# EAGLE board CC2530_PCB_Updated_Antenna+Stim+EMG (EAGLE 7.1.0)
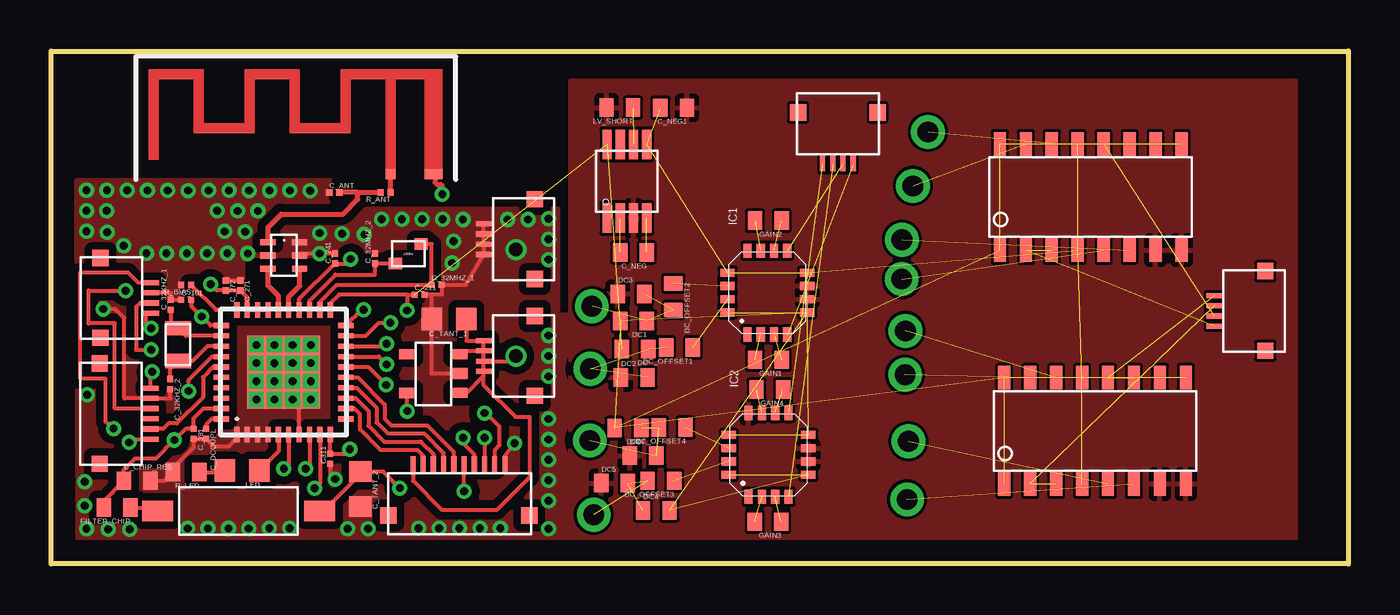
[diagram p0: board, top side]
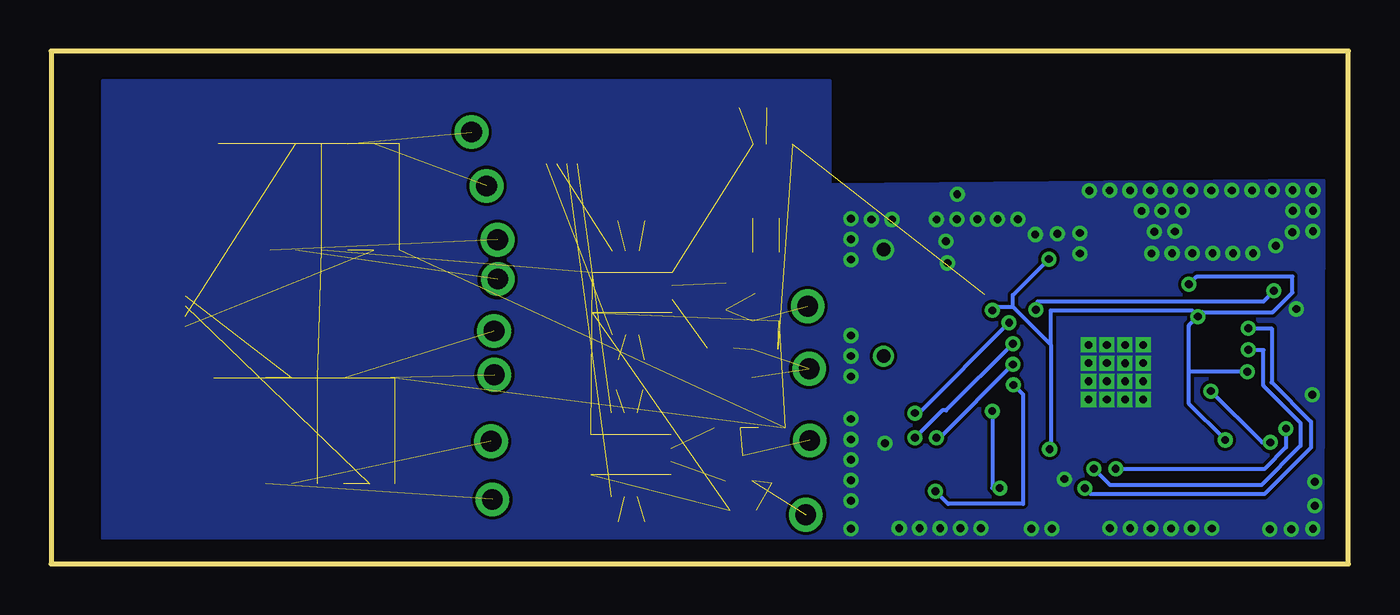
[diagram p1: board, bottom side, seen from below]

Size 63.5 x 25.08 mm. Coordinates in mm from the lower left corner, seen from the top.
Outline: 0,0 0,25.08 63.5,25.08 63.5,0 0,0
Copper layers (1*16): Top 0.0356mm / dielectric 1.5011mm / Bottom 0.0356mm
Design rules "Eagle_DRC_OSHPark": minimum track width 6mil, minimum drill 13mil, track to track 6mil, track to pad 6mil, pad to pad 6mil, via to via 6mil, smd to smd 6mil, copper to edge 15mil, drill to drill 6mil, minimum pad ring 7mil, minimum via ring 7mil, stop-mask expansion 3mil, vias tented up to drill 0mil, thermal gap 10mil

## Footprints (pad centres in the part's own frame; a part is rotated, then mirrored left to right if it is on the bottom)
X32.768KHZ = smd 1.25 x 0.7: Q1 0.009,-0.811; Q2 0.009,0.789
0201_R/L/C = smd 0.3 x 0.3: 1 -0.245,-0.001; 2 0.245,-0.001
0402_R/L/C = smd 0.7 x 0.9: 1 -0.65,0.001; 2 0.65,0.001
0603_R/L/C = smd 1 x 1.1: 1 -0.85,0; 2 0.85,0
DBG_ELECTRODE = drill 1.016 pad 1.651: P$1 0,0
FFC4POS = smd 0.762 x 0.254: 1 0.04,0.742; 2 0.04,0.242; 3 0.04,-0.258; 4 0.04,-0.758 | smd 0.8 x 0.8: P$5 -2.46,1.94; P$6 -2.46,-1.96
QFN-16 = smd 0.7 x 0.4: -IN1 -2.05,0.975; -IN2 2.05,0.975; IN1 -2.05,-0.975; IN2 2.05,-0.975; RG1 -2.05,0.325; RG1_1 -2.05,-0.325; RG2 2.05,0.325; RG2_1 2.05,-0.325 | smd 0.4 x 0.7: -VS 0.975,1.95; -VS_B 0.975,-1.95; OUT1 -0.325,1.95; OUT2 0.325,1.95; REF1 -0.325,-1.95; REF2 0.325,-1.95; VS -0.975,1.95; VS_B -0.975,-1.95
ANTENNA = smd 0.5 x 0.5: A 0,0 | smd 0.5 x 0.9: GND 0,-2.1
CC2530 = smd 0.762 x 0.254: AVDD1 3.048,1.27; AVDD2 3.048,0.762; AVDD3 3.048,-0.762; AVDD4 3.048,1.778; AVDD5 3.048,-2.286; DVDD2 -3.048,-2.286; GND1 -3.048,2.286; GND2 -3.048,1.778; GND3 -3.048,1.27; GND4 -3.048,0.762; P1_1 -3.048,-1.778; P1_2 -3.048,-1.27; P1_3 -3.048,-0.762; P1_4 -3.048,-0.254; P1_5 -3.048,0.254; RBIAS 3.048,2.286; RF_N 3.048,0.254; RF_P 3.048,-0.254; XOSC_Q1 3.048,-1.778; XOSC_Q2 3.048,-1.27 | smd 0.254 x 0.762: AVDD6 2.286,3.048; DCOUPL -2.286,3.048; DVDD1 -1.778,3.048; P0_0 1.778,-3.048; P0_1 1.27,-3.048; P0_2 0.762,-3.048; P0_3 0.254,-3.048; P0_4 -0.254,-3.048; P0_5 -0.762,-3.048; P0_6 -1.27,-3.048; P0_7 -1.778,-3.048; P1_0 -2.286,-3.048; P1_6 -1.27,3.048; P1_7 -0.762,3.048; P2_0 -0.254,3.048; P2_1 0.254,3.048; P2_2 0.762,3.048; P2_3/XOSC32K_Q2 1.27,3.048; P2_4/XOSC32K_Q1 1.778,3.048; RESET_N 2.286,-3.048 | smd 3.56 x 3.56: GND0 0,0 | drill 0.381 square: GND001 -1.335,1.335; GND002 -0.445,1.335; GND003 0.445,1.335; GND004 1.335,1.335; GND005 -1.335,0.445; GND006 -0.445,0.445; GND007 0.44,0.445; GND008 1.335,0.445; GND009 -1.335,-0.445; GND010 -0.445,-0.445; GND011 0.445,-0.445; GND012 1.335,-0.445; GND013 -1.335,-1.335; GND014 -0.445,-1.335; GND015 0.445,-1.335; GND016 1.335,-1.335
BALUN = smd 0.75 x 0.3: BALANCED3 -0.782,-0.655; BALANCED4 0.768,-0.655; GND2 -0.782,-0.005; GND5 0.768,-0.005; GND6 0.768,0.645; UNBALANCED -0.782,0.645
X32MHZ = smd 0.55 x 0.65: Q1 0.496,-0.576; Q2 -0.454,0.674
S-PDSO-G8 = smd 0.45 x 1.45: 1 -0.975,-1.8; 2 -0.325,-1.8; 3 0.325,-1.8; 4 0.975,-1.8; 5 0.975,1.8; 6 0.325,1.8; 7 -0.325,1.8; 8 -0.975,1.8
SOIC-16-ON-SEMI = smd 0.6 x 1.15: 1 -4.445,-2.6; 2 -3.175,-2.6; 3 -1.905,-2.6; 4 -0.635,-2.6; 5 0.635,-2.6; 6 1.905,-2.6; 7 3.175,-2.6; 8 4.445,-2.6; 9 4.445,2.6; 10 3.175,2.6; 11 1.905,2.6; 12 0.635,2.6; 13 -0.635,2.6; 14 -1.905,2.6; 15 -3.175,2.6; 16 -4.445,2.6
REGULATOR = smd 0.5 x 0.8: 1 0.94,1.275; 2 0,1.275; 3 -0.95,1.275; 4 -0.95,-1.275; 5 0.95,-1.275
FFC10POS = smd 0.762 x 0.254: 1 -0.015,2.271; 2 -0.015,1.771; 3 -0.015,1.271; 4 -0.015,0.771; 5 -0.015,0.271; 6 -0.015,-0.229; 7 -0.015,-0.729; 8 -0.015,-1.229; 9 -0.015,-1.729; 10 -0.015,-2.229 | smd 0.8 x 0.8: P$11 -2.52,3.47; P$12 -2.52,-3.43
FFC6POS = smd 0.762 x 0.254: 1 0.008,1.269; 2 0.008,0.769; 3 0.008,0.269; 4 0.008,-0.231; 5 0.008,-0.731; 6 0.008,-1.231 | smd 0.8 x 0.8: P$7 -2.49,2.47; P$8 -2.49,-2.43
SWITCH_MANUAL = smd 1.524 x 1.016: 1 -4.13,0; 2 3.81,0
DRILL_CONNECT = drill 0.66 pad 1.016: 1 0,0

## Placement (x,y rotation side)
32KHZ  X32.768KHZ  [X32.768KHZ]  6.23,10.71 180 top
C311  100nF  [0201_R/L/C]  13.67,5.14 90 top
C_32KHZ_1  15pF  [0201_R/L/C]  5.86,12.67 90 top
C_32KHZ_2  15pF  [0201_R/L/C]  5.84,8.79 270 top
C_32MHZ_1  20pF  [0201_R/L/C]  18.87,13.65 0 top
C_32MHZ_2  20pF  [0201_R/L/C]  15.85,14.94 90 top
C_101  100nF  [0201_R/L/C]  6.62,12.91 0 top
C_211  100nF  [0201_R/L/C]  18.04,13.17 0 top
C_241  100nF  [0201_R/L/C]  13.9,14.93 90 top
C_271  100nF  [0201_R/L/C]  9.27,13.62 270 top
C_272  220pF  [0201_R/L/C]  8.56,13.62 270 top
C_391  1uF  [0201_R/L/C]  6.98,6.35 270 top
C_ANT  0.5pF  [0201_R/L/C]  13.86,18.16 0 top
C_CHIP_RES  2.2uF  [0402_R/L/C]  4.21,4.06 0 top
C_DCOUPL  0.47uF  [0201_R/L/C]  7.6,6.35 270 top
C_NEG  10uF  [0402_R/L/C]  28.5,15.23 180 top
C_NEG1  10uF  [0402_R/L/C]  30.47,22.31 180 top
C_TANT_1  1uF  [0603_R/L/C]  19.49,11.98 180 top
C_TANT_2  2.2uF  [0603_R/L/C]  15.14,3.66 270 top
DC  0  [0402_R/L/C]  28.58,10.5 180 top
DC1  0  [0402_R/L/C]  28.51,11.88 180 top
DC2  0  [0402_R/L/C]  28.54,9.12 0 top
DC3  0  [0402_R/L/C]  28.38,13.21 0 top
DC4  0  [0402_R/L/C]  29.62,2.61 0 top
DC5  0  [0402_R/L/C]  27.57,3.94 0 top
DC6  0  [0402_R/L/C]  28.23,6.64 180 top
DC7  0  [0402_R/L/C]  28.98,5.29 0 top
DC_OFFSET1  10uF  [0402_R/L/C]  30.75,10.57 180 top
DC_OFFSET2  10uF  [0402_R/L/C]  30.46,13.07 270 top
DC_OFFSET3  10uF  [0402_R/L/C]  29.84,4.06 180 top
DC_OFFSET4  10uF  [0402_R/L/C]  30.4,6.67 180 top
EMG1  DBG_ELECTRODE  [DBG_ELECTRODE]  26.4,9.55 0 top
FILTER_CHIP  L_1k  [0402_R/L/C]  3.24,2.75 180 top
GAIN1  0  [0402_R/L/C]  35.11,9.98 180 top
GAIN2  0  [0402_R/L/C]  35.11,16.79 180 top
GAIN3  0  [0402_R/L/C]  35.09,2.06 180 top
GAIN4  0  [0402_R/L/C]  35.18,8.52 180 top
GND_IN  FFC4POS  [FFC4POS]  21.22,15.87 180 top
IC1  AD8222_NEW  [QFN-16]  35.06,13.27 90 top
IC2  AD8222_NEW  [QFN-16]  35.12,5.33 90 top
INVERTED_F-ANTENNA  ANTENNA  [ANTENNA]  16.62,19.05 90 top
LED  [0603_R/L/C]  9.35,4.57 180 top
LV_SHORT  0  [0402_R/L/C]  27.84,22.32 180 top
R_ANT  0.0  [0201_R/L/C]  16.38,18.16 180 top
R_BIAS  56k  [0201_R/L/C]  6.62,13.64 180 top
R_LED  1k  [0402_R/L/C]  6.61,4.49 180 top
U$1  [CC2530]  11.38,9.37 90 top
U$2  BALUN  [BALUN]  11.4,15.09 0 top
U$3  X32MHZ  [X32MHZ]  17.53,15.15 90 top
U$4  TL7660  [S-PDSO-G8]  28.18,18.71 0 top
U$5  MC74HC4316A  [SOIC-16-ON-SEMI]  50.88,17.95 0 top
U$6  MC74HC4316A  [SOIC-16-ON-SEMI]  51.09,6.5 0 top
U$9  DBG_ELECTRODE  [DBG_ELECTRODE]  42.92,21.13 0 top
U$10  REGULATOR  [REGULATOR]  18.71,9.31 270 top
U$11  DBG_ELECTRODE  [DBG_ELECTRODE]  42.19,18.49 0 top
U$12  DBG_ELECTRODE  [DBG_ELECTRODE]  41.64,15.86 0 top
U$13  FFC4POS  [FFC4POS]  4.87,13.01 0 top
U$14  DBG_ELECTRODE  [DBG_ELECTRODE]  41.64,13.93 0 top
U$15  FFC10POS  [FFC10POS]  19.98,4.89 90 top
U$16  DBG_ELECTRODE  [DBG_ELECTRODE]  41.9,3.15 0 top
U$17  FFC6POS  [FFC6POS]  4.87,7.33 0 top
U$18  SWITCH_MANUAL  [SWITCH_MANUAL]  9.02,2.59 180 top
U$19  DBG_ELECTRODE  [DBG_ELECTRODE]  41.96,5.99 0 top
U$22  DBG_ELECTRODE  [DBG_ELECTRODE]  41.81,11.39 0 top
U$23  DBG_ELECTRODE  [DBG_ELECTRODE]  41.8,9.25 0 top
U$24  FFC4POS  [FFC4POS]  38.52,19.62 270 top
U$25  DBG_ELECTRODE  [DBG_ELECTRODE]  26.47,12.6 0 top
U$26  DBG_ELECTRODE  [DBG_ELECTRODE]  26.56,2.4 0 top
U$27  DBG_ELECTRODE  [DBG_ELECTRODE]  26.37,6.04 0 top
U$28  FFC4POS  [FFC4POS]  56.97,12.36 180 top
V+_IN  FFC4POS  [FFC4POS]  21.22,10.16 180 top
WIRE+  DRILL_CONNECT  [DRILL_CONNECT]  22.75,10.16 90 top
WIRE-  DRILL_CONNECT  [DRILL_CONNECT]  22.75,15.36 90 top

## Library data of the parts
32KHZ C311 C_32KHZ_1 C_32KHZ_2 C_32MHZ_1 C_32MHZ_2 C_101 C_211 C_241 C_271 C_272 C_391 C_ANT C_CHIP_RES C_DCOUPL C_NEG C_NEG1 C_TANT_1 C_TANT_2 DC DC1-DC7 DC_OFFSET1-DC_OFFSET4 FILTER_CHIP GAIN1-GAIN4 GND_IN INVERTED_F-ANTENNA LED LV_SHORT R_ANT R_BIAS R_LED U$1 U$2 U$10 U$13 U$15 U$17 U$18 U$24 U$28 V+_IN WIRE+ WIRE- = CC2530_PCB_TL
EMG1 IC1 IC2 U$4-U$6 U$9 U$11 U$12 U$14 U$16 U$19 U$22 U$23 U$25-U$27 = moth
U$3 = CC2530_PCB_TL; X: 32MHz

## Nets
DCOUPL1: C_DCOUPL.1 U$1.DCOUPL
EMG1: DC2.2 DC.1 DC_OFFSET1.2 EMG1.P$1
EMG2: DC1.1 DC3.2 DC_OFFSET2.2 U$25.P$1
EMG3: DC4.1 DC5.2 DC_OFFSET3.2 U$26.P$1
EMG4: DC6.1 DC7.2 DC_OFFSET4.2 U$27.P$1
GND: C311.1 C_32KHZ_1.2 C_32KHZ_2.2 C_32MHZ_1.2 C_32MHZ_2.2 C_101.1 C_211.2 C_241.2 C_271.1 C_272.1 C_391.2 C_ANT.1 C_CHIP_RES.2 C_DCOUPL.2 C_NEG1.1 C_TANT_1.2 C_TANT_2.2 DC2.1 DC3.1 DC5.1 DC7.1 GND_IN.1 GND_IN.2 GND_IN.3 GND_IN.4 IC1.REF1 IC1.REF2 IC2.-IN2 IC2.REF1 IC2.REF2 INVERTED_F-ANTENNA.GND LV_SHORT.2 R_BIAS.2 R_LED.2 U$1.GND0 U$1.GND001 U$1.GND1 U$1.GND2 U$1.GND002 U$1.GND003 U$1.GND3 U$1.GND4 U$1.GND004 U$1.GND005 U$1.GND006 U$1.GND007 U$1.GND008 U$1.GND009 U$1.GND010 U$1.GND011 U$1.GND012 U$1.GND013 U$1.GND014 U$1.GND015 U$1.GND016 U$1.P1_3 U$2.GND2 U$2.GND5 U$2.GND6 U$4.3 U$5.7 U$5.8 U$6.7 U$6.8 U$10.2 U$13.2 U$15.10 U$17.2 WIRE-.1
LED/P1_5: LED.1 U$1.P1_5
LT/P1_4: U$1.P1_4 U$13.1
N$1: C_ANT.2 R_ANT.2 U$2.UNBALANCED
N$2: INVERTED_F-ANTENNA.A R_ANT.1
N$3: C_NEG.2 U$4.2
N$4: C_NEG.1 U$4.4
N$5: LV_SHORT.1 U$4.6
N$6: GAIN1.2 IC1.RG1
N$7: GAIN1.1 IC1.RG1_1
N$8: GAIN2.2 IC1.RG2
N$9: GAIN2.1 IC1.RG2_1
N$10: GAIN3.2 IC2.RG1
N$11: GAIN3.1 IC2.RG1_1
N$12: GAIN4.2 IC2.RG2
N$13: GAIN4.1 IC2.RG2_1
N$14: DC_OFFSET1.1 IC1.OUT1
N$15: DC_OFFSET2.1 IC1.OUT2
N$16: DC_OFFSET4.1 IC2.OUT2
N$17: DC_OFFSET3.1 IC2.OUT1
N$18: IC2.IN2 U$24.4
N$19: IC2.IN1 U$24.3
N$20: IC1.IN2 U$24.2
N$21: C_TANT_2.1 U$10.5 U$18.1
N$22: IC1.IN1 U$24.1
N$34: LED.2 R_LED.1
NC: U$4.1
NEG_STIM1: U$5.5 U$14.P$1
NEG_STIM2: U$5.14 U$9.P$1
NEG_STIM3: U$6.5 U$19.P$1
NEG_STIM4: U$6.14 U$22.P$1
OSC: U$4.7
P0_0: U$1.P0_0 U$15.9
P0_1: U$1.P0_1 U$15.8
P0_2: U$1.P0_2 U$15.7
P0_3: U$1.P0_3 U$15.6
P0_4: U$1.P0_4 U$15.5
P0_5: U$1.P0_5 U$15.4
P0_6: U$1.P0_6 U$15.3
P0_7: U$1.P0_7 U$15.2
P2_1: U$1.P2_1 U$17.5
P2_2: U$1.P2_2 U$17.6
P2_3/X32K_Q2: 32KHZ.Q2 C_32KHZ_2.1 U$1.P2_3/XOSC32K_Q2
P2_4/X32K_Q1: 32KHZ.Q1 C_32KHZ_1.1 U$1.P2_4/XOSC32K_Q1
POS_STIM1: U$5.15 U$11.P$1
POS_STIM2: U$5.6 U$12.P$1
POS_STIM3: U$6.15 U$23.P$1
POS_STIM4: U$6.6 U$16.P$1
RBIAS: R_BIAS.1 U$1.RBIAS
RESET: U$1.RESET_N U$17.3
RF_N: U$1.RF_N U$2.BALANCED3
RF_P: U$1.RF_P U$2.BALANCED4
RT/P1_2: U$1.P1_2 U$13.3
STIM1: U$5.2 U$5.3 U$28.1
STIM2: U$5.11 U$5.12 U$28.2
STIM3: U$6.2 U$6.3 U$28.3
STIM4: U$6.11 U$6.12 U$28.4
SWITCH_OUT: FILTER_CHIP.1 U$18.2
UP/P1_1: U$1.P1_1 U$13.4
V+: C_TANT_1.1 U$10.1 U$10.3 U$15.1 V+_IN.1 V+_IN.2 V+_IN.3 V+_IN.4 WIRE+.1
VDD: C311.2 C_101.2 C_211.1 C_241.1 C_271.2 C_272.2 C_391.1 C_CHIP_RES.1 DC1.2 DC4.2 DC6.2 DC.2 FILTER_CHIP.2 IC1.VS IC1.VS_B IC2.VS IC2.VS_B U$1.AVDD1 U$1.AVDD2 U$1.AVDD3 U$1.AVDD4 U$1.AVDD5 U$1.AVDD6 U$1.DVDD1 U$1.DVDD2 U$4.8 U$5.1 U$5.10 U$5.16 U$6.1 U$6.10 U$6.16 U$17.1
VEE: C_NEG1.2 IC1.-VS IC1.-VS_B IC2.-VS IC2.-VS_B U$4.5 U$5.4 U$5.9 U$5.13 U$6.4 U$6.9 U$6.13
X32M_Q1: C_32MHZ_1.1 U$1.XOSC_Q1 U$3.Q1
X32M_Q2: C_32MHZ_2.1 U$1.XOSC_Q2 U$3.Q2

## Tracks (layer width: path | path; a pad name or v marks a point on that pad's centre or on a via)
DCOUPL1
  Top 0.203: U$1.DCOUPL 7.86,7.09 7.59,6.82 C_DCOUPL.1
EMG1  (3 unrouted)
EMG2  (3 unrouted)
EMG3  (3 unrouted)
EMG4  (3 unrouted)
GND  (via drill 0.38, 0.38 pad 0.64)
  Top 0.203: 18.79,19.05 INVERTED_F-ANTENNA.GND | U$1.GND4 U$1.GND3 U$1.GND2 U$1.GND1 9.1,6.14 8.71,5.75 7.95,5.75 C_DCOUPL.2 C_391.2 6.98,5.7 5.96,4.68 R_LED.2 5.54,4.06 C_CHIP_RES.2 | GND_IN.4 GND_IN.3 GND_IN.2 GND_IN.1 20.3,13.65 C_32MHZ_1.2 19.12,13.17 C_211.2 18.62,13.17 18.62,11.98 | U$10.2 18.62,9.31 18.62,11.98 | C_32KHZ_2.2 5.84,8.09 U$17.2 3.58,8.09 3.58,12.02 3.14,12.46 v2.54,12.46 | C_32KHZ_1.2 5.86,13.26 U$13.2 | C_32KHZ_1.2 | C_32KHZ_1.2 C_101.1 | C_272.1 C_271.1 | U$15.10 22.21,5.28 v22.69,5.9 | U$1.P1_3 12.14,8.04 U$1.GND009 U$1.GND005 U$1.GND001 U$1.GND002 U$1.GND006 U$1.GND010 U$1.GND011 U$1.GND007 U$1.GND003 U$1.GND004 U$1.GND008 U$1.GND012 U$1.GND016 U$1.GND015 U$1.GND014 U$1.GND013 | C_241.2 12.26,15.18 U$2.GND5 | C311.1 13.67,4.38 v13.9,4.14 | 18.62,11.98 C_TANT_1.2
  Top 0.254: 18.79,19.05 18.79,18.67 18.91,18.55 19.08,18.55 19.15,18.49 v19.15,18.08
  other vias: 1.73,18.27 1.73,17.27 1.73,16.27 5.71,18.27 2.73,18.27 3.72,18.27 4.72,18.27 6.71,18.26 10.69,18.26 7.71,18.27 8.71,18.27 9.7,18.26 11.69,18.27 12.68,18.26 10.12,17.26 2.73,17.27 8.14,17.27 9.13,17.26 24.34,1.71 24.35,5.08 24.35,6.08 24.34,3.08 24.34,4.08 6.68,1.73 21.99,1.74 20.99,1.74 17.99,1.74 19.98,1.73 18.99,1.73 11.68,1.73 10.68,1.73 7.68,1.73 9.68,1.72 8.68,1.72 13.15,15.18 13.15,16.18 18.16,16.85 16.18,16.85 17.17,16.85 19.16,16.85 20.16,16.85 14.24,16.14 15.33,16.11 7.64,15.19 5.65,15.19 6.64,15.19 8.63,15.19 9.63,15.18 9.5,16.24 8.49,16.26 4.67,15.19 3.56,15.56 2.75,16.22 19.7,15.79 19.62,14.71 24.35,7.08 15.52,1.71 14.51,1.71 24.35,9.17 24.35,10.17 24.35,11.17 24.35,14.88 24.35,15.88 24.35,16.89 23.35,16.85 22.34,16.85 1.73,1.71 2.79,1.69 3.84,1.69 1.64,2.84 1.64,4.02 1.77,8.28
  pour Top (isolate 0.381, no thermals): 13.67,17.37 13.67,18.77 1.23,18.77 1.27,1.27 25.4,1.27 25.4,12.19 9.42,12.32 9.42,15.04 11.92,15.06 13.64,15.06 13.64,12.42 24.85,12.42 24.85,17.37
  pour Bottom (no thermals): 1.23,18.77 1.27,1.27 25.4,1.27 25.4,18.54
  pour Bottom: 25.4,1.27 60.96,1.27 60.96,23.62 25.4,23.62
  pour Top: 60.96,1.27 60.96,23.62 25.4,23.62 25.4,1.27
LED/P1_5
  Top 0.203: U$1.P1_5 11.13,5.5 LED.1
LT/P1_4  (via drill 0.38 pad 0.64)
  Top 0.203: U$13.1 4.25,13.76 3.77,14.24 1.43,14.24 1.43,9.05 2.66,9.05 2.66,6.96 v3.06,6.61 | U$1.P1_4 11.63,4.89 v11.39,4.65
  Bottom 0.203: v11.39,4.65 4.11,4.65 3.06,5.7 v3.06,6.61
N$1
  Top 0.203: C_ANT.2
  Top 0.254: U$2.UNBALANCED 10.62,16.47 11.25,17.1 14.29,17.1 15.01,17.83 15.01,18.16 | 15.01,18.16 R_ANT.2 | 15.01,18.16 C_ANT.2
N$2
  Top 0.203: INVERTED_F-ANTENNA.A
  Top 0.254: R_ANT.1 INVERTED_F-ANTENNA.A
N$3  (1 unrouted)
N$4  (1 unrouted)
N$5  (1 unrouted)
N$6  (1 unrouted)
N$7  (1 unrouted)
N$8  (1 unrouted)
N$9  (1 unrouted)
N$10  (1 unrouted)
N$11  (1 unrouted)
N$12  (1 unrouted)
N$13  (1 unrouted)
N$14  (1 unrouted)
N$15  (1 unrouted)
N$16  (1 unrouted)
N$17  (1 unrouted)
N$18  (1 unrouted)
N$19  (1 unrouted)
N$20  (1 unrouted)
N$21  (via drill 0.38 pad 0.64)
  Top 0.203: v17.43,7.47 U$10.5 | U$18.1 13.35,2.58 15.14,4.37 C_TANT_2.1 16.26,4.51 v17.07,3.7
  Bottom 0.203: v17.43,7.47 17.43,3.7 v17.07,3.7
N$22  (1 unrouted)
N$34
  Top 0.203: 8.41,4.49 LED.2 8.51,4.49 R_LED.1
NEG_STIM1  (1 unrouted)
NEG_STIM2  (1 unrouted)
NEG_STIM3  (1 unrouted)
NEG_STIM4  (1 unrouted)
P0_0  (via drill 0.38 pad 0.64)
  Top 0.203: v21.21,7.37 21.29,7.37 21.94,6.72 21.94,5.79 21.71,5.57 U$15.9 | U$1.P0_0 15.38,11.15 16.02,11.79 v16.61,11.79
  Bottom 0.203: v16.61,11.79 21.02,7.37 v21.21,7.37
P0_1  (via drill 0.38 pad 0.64)
  Top 0.203: v21.21,6.17 U$15.8 | U$15.8 | U$1.P0_1 16.3,10.64 v16.43,10.77
  Bottom 0.203: v21.21,6.17 19.88,7.51 19.69,7.51 v16.43,10.77
P0_2  (via drill 0.38 pad 0.64)
  Top 0.203: v20.16,6.17 20.16,5.9 20.71,5.35 U$15.7 | U$1.P0_2 16.04,10.13 v16.42,9.75
  Bottom 0.203: v16.42,9.75 20,6.17 v20.16,6.17
P0_3  (via drill 0.38 pad 0.64)
  Top 0.203: v20.21,3.55 U$15.6 | U$1.P0_3 15.52,9.63 v16.4,8.75
  Bottom 0.203: v20.21,3.55 19.59,2.93 15.93,2.93 15.93,8.29 v16.4,8.75
P0_4
  Top 0.203: U$1.P0_4 15.01,9.12 16.34,7.79 16.34,7.08 16.64,6.78 18.41,6.78 19.71,5.48 U$15.5
P0_5
  Top 0.203: U$1.P0_5 14.96,8.61 15.93,7.64 15.93,6.92 16.47,6.38 18.25,6.38 19.21,5.41 U$15.4
P0_6
  Top 0.203: U$1.P0_6 14.9,8.1 15.53,7.47 15.53,6.75 16.31,5.97 18.09,5.97 18.71,5.35 U$15.3
P0_7
  Top 0.203: U$15.2 18.21,5.28 17.93,5.56 16.14,5.56 15.13,6.58 15.13,7.32 14.85,7.59 U$1.P0_7
P2_1
  Top 0.203: U$1.P2_1 7.93,9.63 7.44,9.13 7.44,8.16 6.15,6.87 5.76,6.87 5.49,6.59 U$17.5
P2_2  (via drill 0.38 pad 0.64)
  Top 0.203: v6.74,8.45 6.74,9.01 7.86,10.13 U$1.P2_2 | v3.82,5.94 3.98,6.09 U$17.6
  Bottom 0.203: v3.82,5.94 4.22,5.94 v6.74,8.45
P2_3/X32K_Q2
  Top 0.203: U$1.P2_3/XOSC32K_Q2 7.65,10.64 6.93,9.92 32KHZ.Q2 5.84,9.54 C_32KHZ_2.1
P2_4/X32K_Q1
  Top 0.203: U$1.P2_4/XOSC32K_Q1 6.59,11.15 32KHZ.Q1 5.86,11.52 C_32KHZ_1.1
POS_STIM1  (1 unrouted)
POS_STIM2  (1 unrouted)
POS_STIM3  (1 unrouted)
POS_STIM4  (1 unrouted)
RBIAS
  Top 0.203: U$1.RBIAS 8.08,12.42 R_BIAS.1
RESET  (via drill 0.38 pad 0.64)
  Top 0.203: U$1.RESET_N 15.19,12.42 v15.29,12.42 | U$17.3 3.12,7.59 3.12,11.76 1.84,11.76 1.84,13.36 v3.65,13.36
  Bottom 0.203: v15.29,12.42 15.29,12.74 15.2,12.83 4.18,12.83 3.65,13.35 v3.65,13.36
RF_N
  Top 0.203: U$2.BALANCED3
  Top 0.254: U$1.RF_N 11.13,13.09 10.62,13.6 U$2.BALANCED3
RF_P
  Top 0.203: U$2.BALANCED4
  Top 0.254: U$1.RF_P 11.63,13.06 12.17,13.59 U$2.BALANCED4
RT/P1_2  (via drill 0.38 pad 0.64)
  Top 0.203: U$1.P1_2 12.65,4.84 v12.46,4.65 | U$13.3 4.35,12.76 4.16,12.56 4.16,10.47 v4.9,10.47
  Bottom 0.203: v4.9,10.47 4.16,10.47 4.16,8.71 2.34,6.89 2.34,5.77 4.26,3.85 11.66,3.85 v12.46,4.65
STIM1  (2 unrouted)
STIM2  (2 unrouted)
STIM3  (2 unrouted)
STIM4  (2 unrouted)
SWITCH_OUT
  Top 0.203: 5.18,2.55 U$18.2 5.21,2.75 FILTER_CHIP.1
UP/P1_1  (via drill 0.38 pad 0.64)
  Top 0.203: U$1.P1_1 13.16,3.95 v12.91,3.69 | v4.9,11.52 4.63,11.52 4.63,12.26 U$13.4
  Bottom 0.203: v4.9,11.52 3.75,11.52 3.75,8.87 1.84,6.96 1.84,5.68 4.11,3.4 12.62,3.4 v12.91,3.69
V+
  Top 0.203: V+_IN.1 V+_IN.2 | V+_IN.2 V+_IN.3 | V+_IN.3 V+_IN.4 20.34,10.92 C_TANT_1.1 | U$10.1 20.28,8.29 21.18,9.19 V+_IN.1 | U$10.3 20.22,10.42 V+_IN.3 | U$15.1 17.71,4.05 19.12,2.64 21.84,2.64 23.42,4.23 23.42,7.18 22.72,7.18 21.18,8.73 V+_IN.1 | V+_IN.2 22.51,9.92 WIRE+.1
VDD  (via drill 0.38 pad 0.64)  (15 unrouted)
  Top 0.203: U$1.AVDD2 U$1.AVDD1 U$1.AVDD4 9.6,13.03 C_271.2 C_272.2 8.11,13.37 v7.81,13.67 | C311.2 | U$1.AVDD3 12.14,12.96 13.87,14.69 C_241.1 14.45,14.69 v14.67,14.91 | U$1.AVDD5 13.67,12.75 14.09,13.17 17.42,13.17 | U$1.DVDD1 7.46,7.6 6.98,7.12 C_391.1 6.58,6.6 v6.04,6.05 5.14,5.16 4.12,5.16 3.56,4.61 C_CHIP_RES.1 2.59,3.09 FILTER_CHIP.2 | U$1.AVDD6 7.81,11.66 v7.37,12.1 6.86,12.61 C_101.2 | C311.2 U$1.DVDD2 | 17.42,13.17 v17.42,12.39 | 17.42,13.17 C_211.1 | U$17.1 4.88,9.34 v4.94,9.4 | C311.2 14.41,5.38 v14.62,5.6
  Bottom 0.203: v6.04,6.05 7.81,7.83 7.81,9.4 | 7.81,9.4 7.81,11.66 v7.37,12.1 | v7.37,12.1 7.66,12.38 14.57,12.38 14.57,10.73 | v7.81,13.67 7.41,14.07 2.75,14.07 2.75,13.27 3.71,12.31 7.16,12.31 v7.37,12.1 | 7.17,12.3 v7.37,12.1 | 16.43,12.58 16.43,13.14 v14.67,14.91 | 16.43,12.58 14.57,10.73 | v17.42,12.39 17.42,12.58 16.43,12.58 | v4.94,9.4 7.81,9.4 | 14.57,10.73 14.57,5.65 v14.62,5.6
VEE  (11 unrouted)
X32M_Q1
  Top 0.203: U$1.XOSC_Q1 13.16,12.82 13.98,13.64 C_32MHZ_1.1 18.63,15.64 U$3.Q1
X32M_Q2
  Top 0.203: U$1.XOSC_Q2 12.65,12.88 13.92,14.15 15.86,14.15 C_32MHZ_2.1 U$3.Q2